# Altium PCB PA_Receiver.PcbDoc (part 1 of 2)
Units mm, origin at the board's own origin, x right, y up, seen from the top; angles counter-clockwise.
Board outline 99.95 x 68.33 mm, 4 copper layers (Top Layer, Layer 1, Layer 2, Bottom Layer), stack 0.603 mm thick; 128 components, 106 nets, 468 pads, 289 vias.
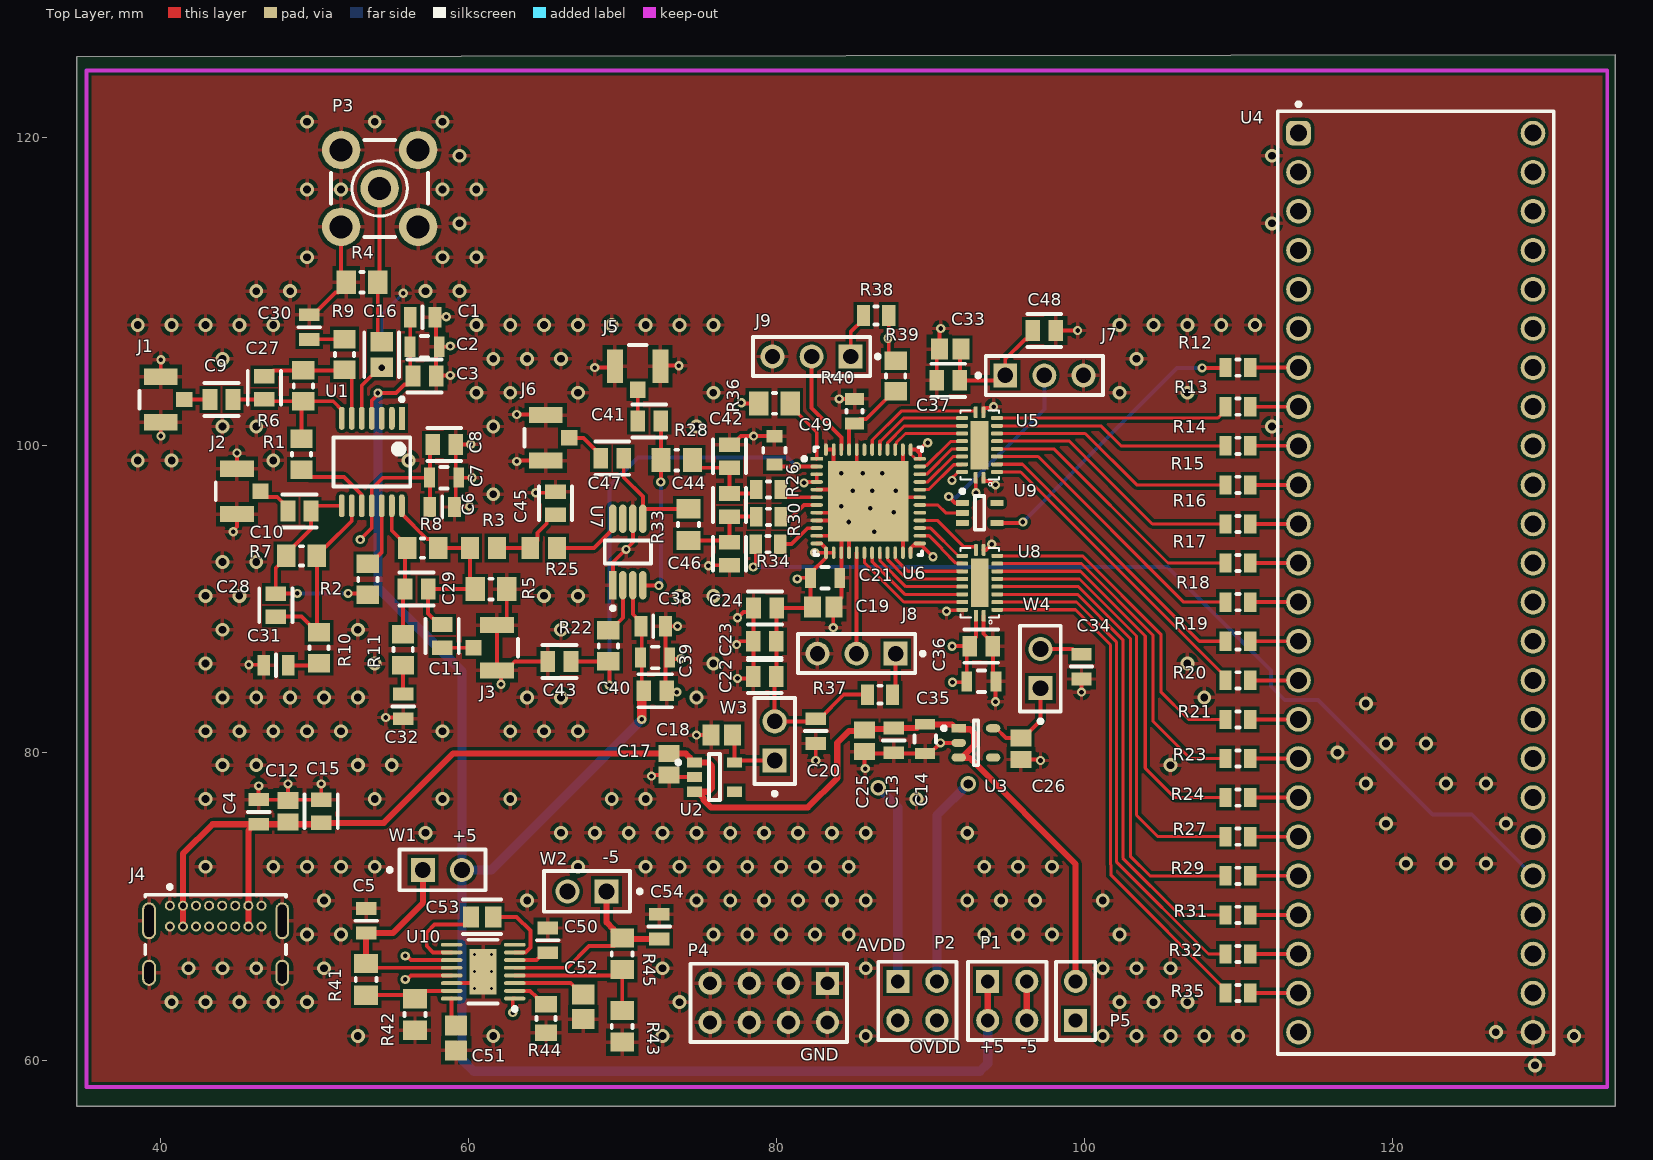
[diagram p0: Top Layer view]
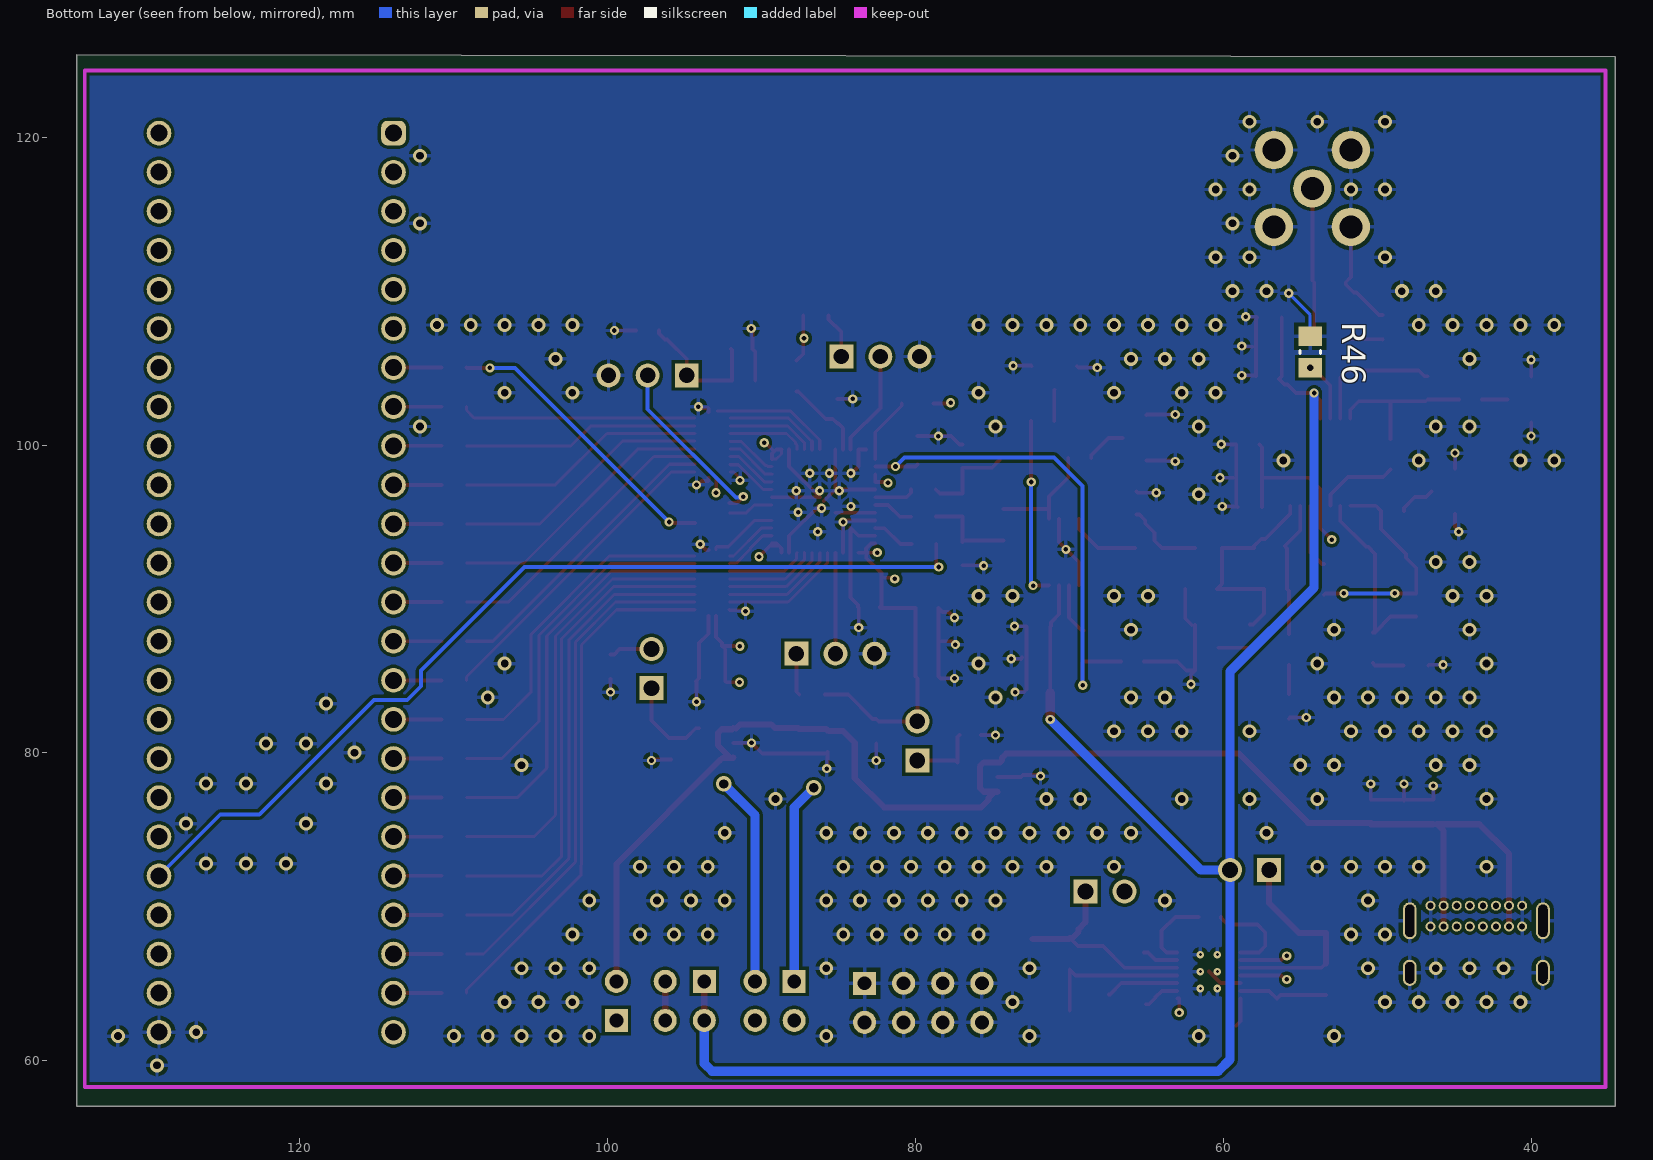
[diagram p1: Bottom Layer view, seen from below]
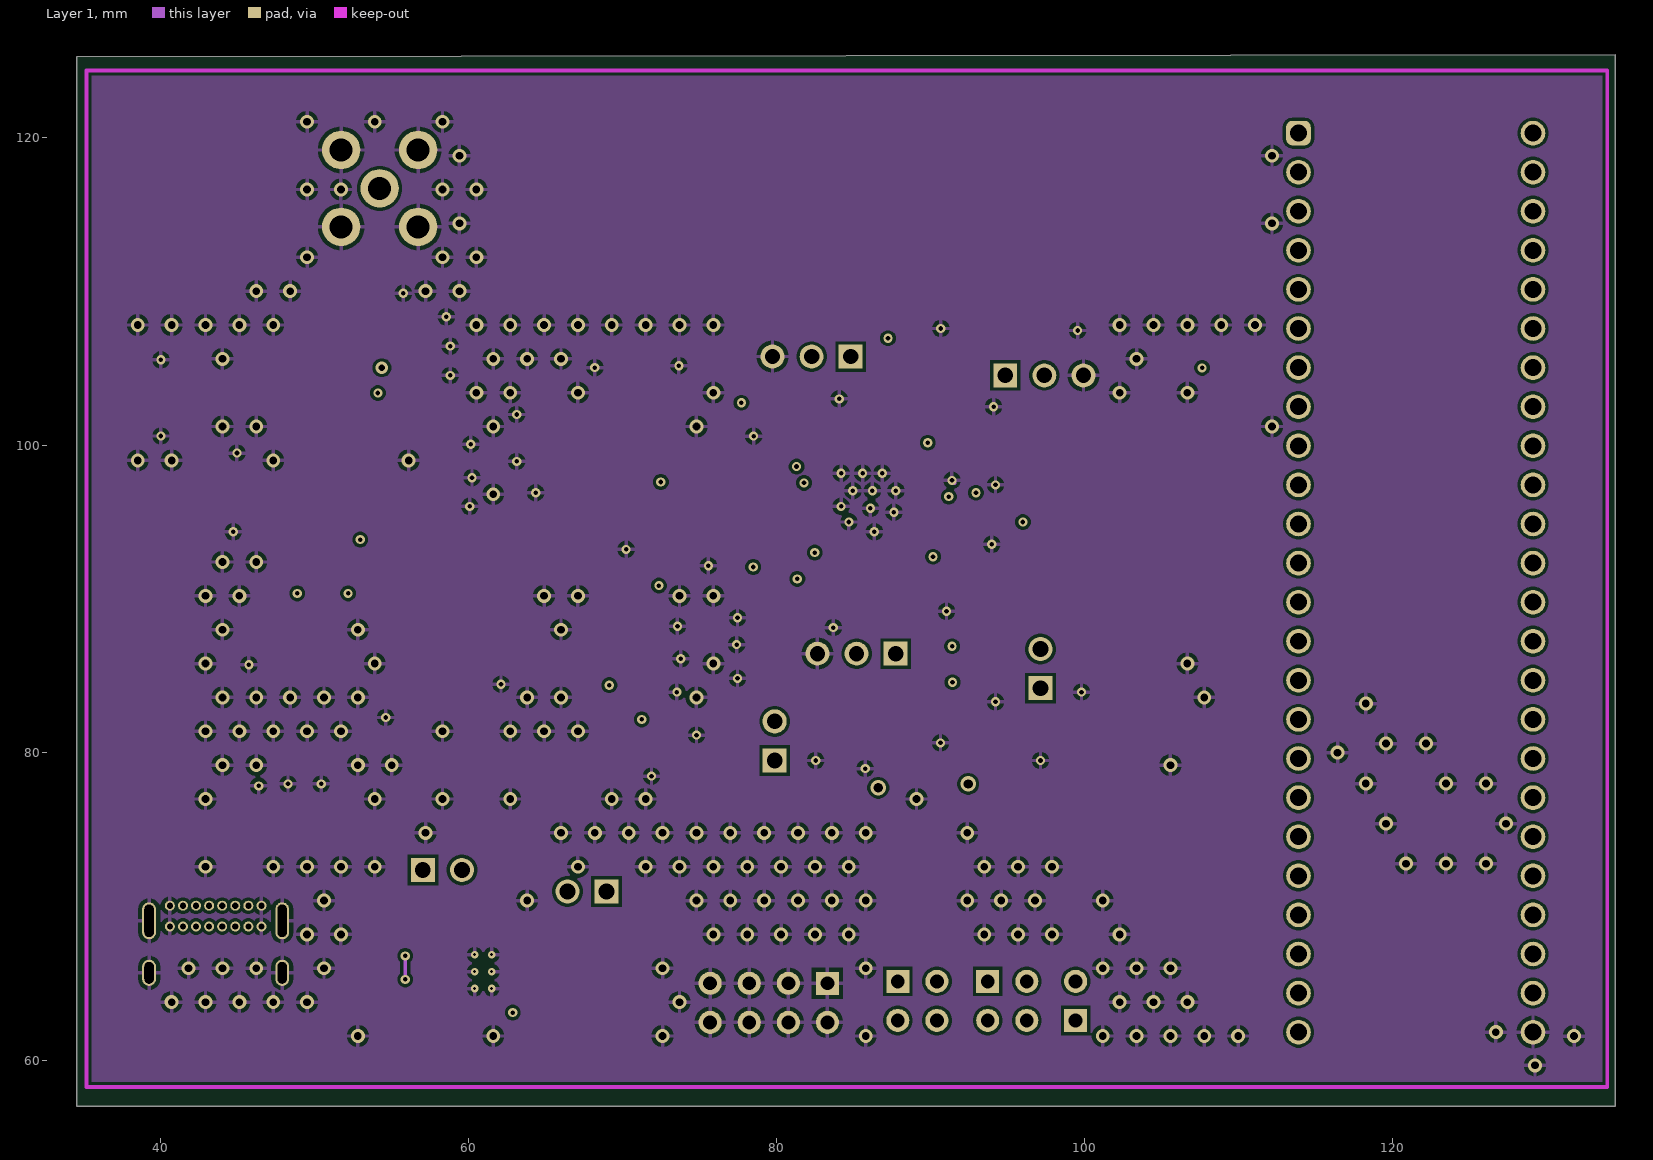
[diagram p2: Layer 1]
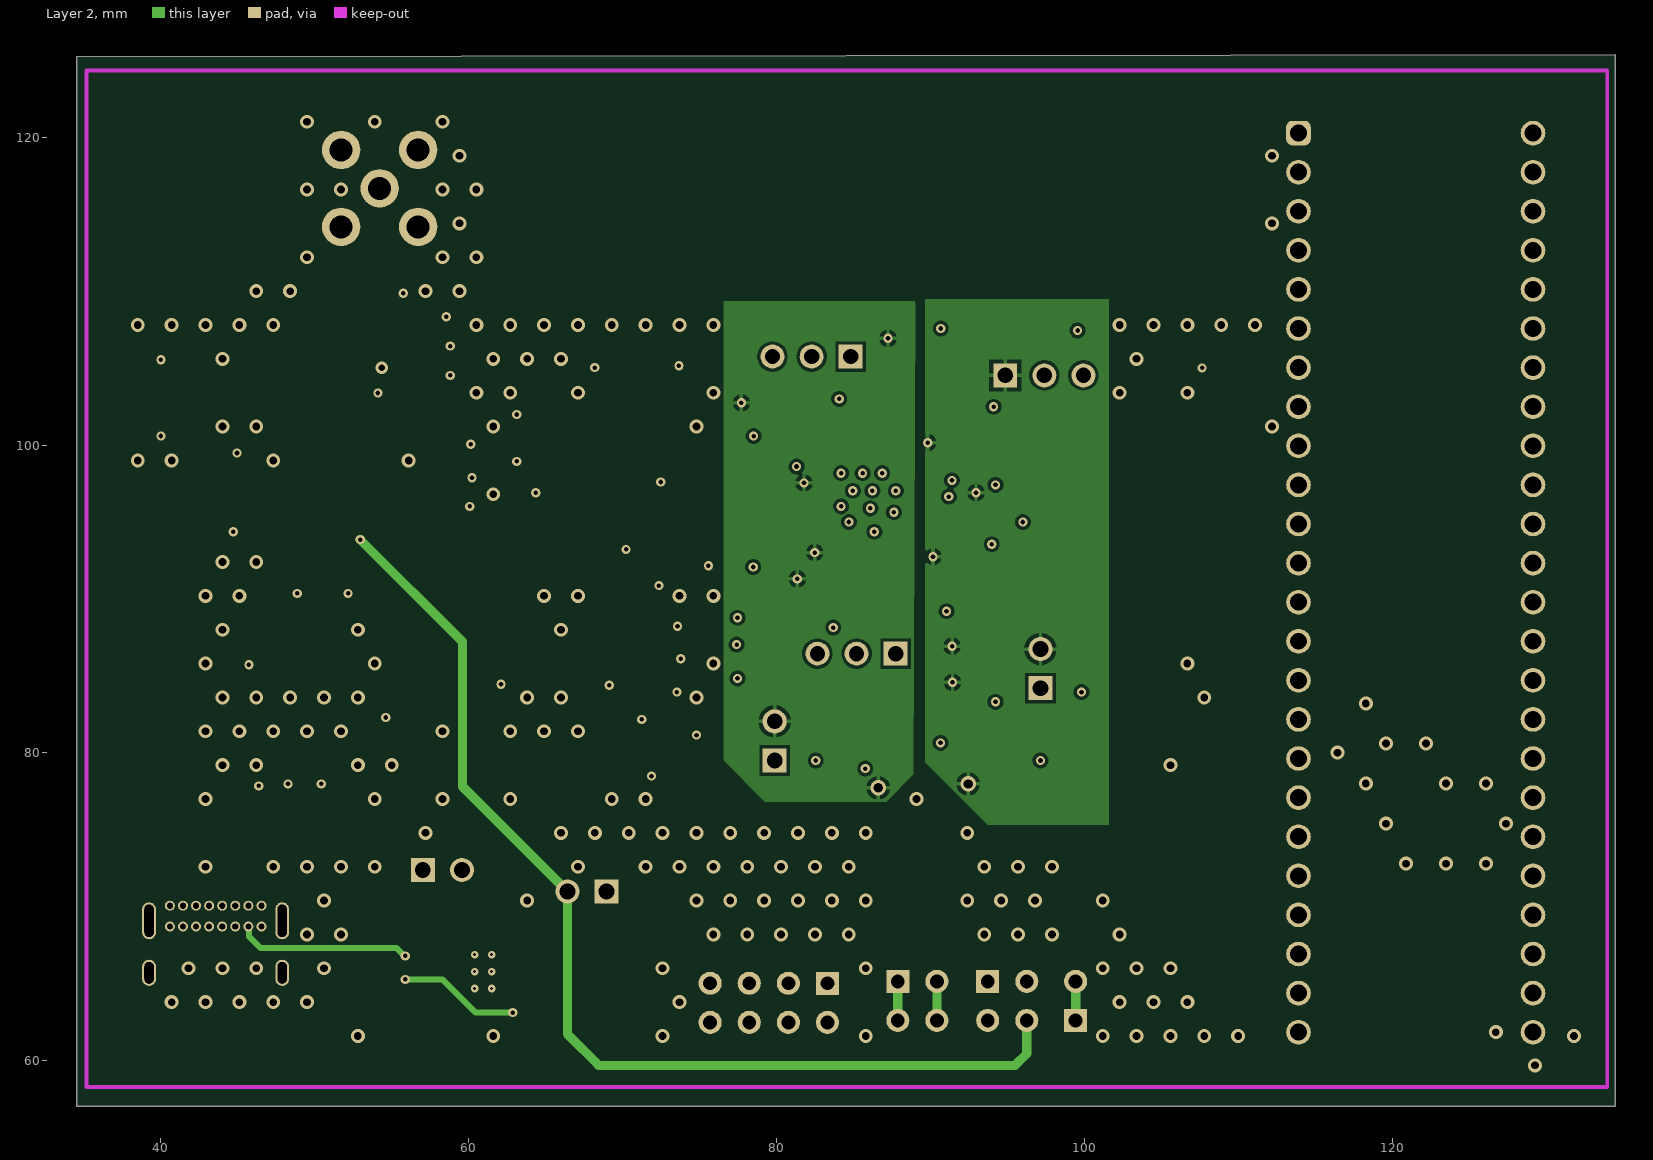
[diagram p3: Layer 2]
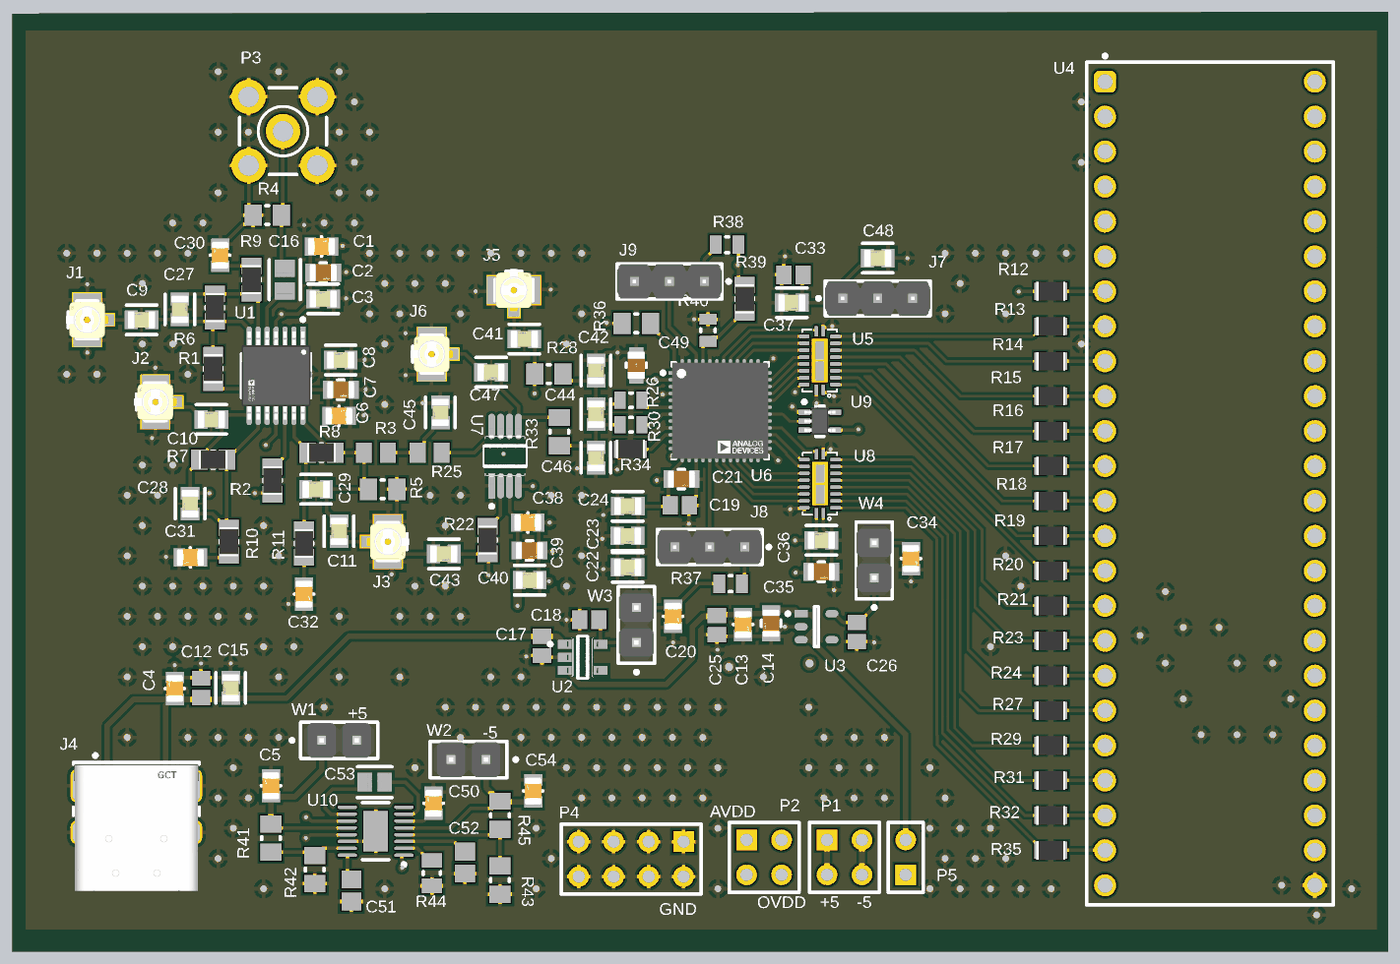
[diagram p5: 3D render of the assembled board from above, using the file's embedded part models]

## Layer stack, top to bottom
Top Solder: solder mask 0.0102, Solder Resist, Dk 3.5
Top Layer: signal copper 0.0356
Dielectric 2: prepreg 0.0711, PP-006, Dk 4.1
Layer 1: signal copper 0.035
Dielectric 1: dielectric 0.32, FR-4, Dk 4.8
Layer 2: signal copper 0.035
Dielectric 3: prepreg 0.0711, PP-006, Dk 4.1
Bottom Layer: signal copper 0.0356
Bottom Solder: solder mask 0.0102, Solder Resist, Dk 3.5

## Board outline
34.544,125.222 34.544,57.023 134.493,57.023 134.493,125.349

## Design rules (kind name [scope] priority, off if disabled: settings)
Clearance [All] p1: gap=0.2 ignorepadtopadclearanceinfootprint=TRUE
PolygonConnect [All] p1: connectstyle=Relief reliefconductorwidth=0.254 reliefentries=4 polygonreliefangle="90 Angle" airgapwidth=0.254
RoutingVias [All] p1: holewidth=0.3 width=0.6 viastyle="Through Hole" minholewidth=0.254 minwidth=0.5 maxholewidth=1 maxwidth=2
SolderMaskExpansion [All] p1: expansion=0.1 istentingtop=FALSE
SupplyNets "Schematic Supply Nets" [InNet('GND')] p1: voltage=0.000
Width [All] p1: maxlimit=2 minlimit=0.2 preferedwidth=0.2 minimp=50.000000 maximp=50.000000 favimp=50.000000
30 further rules are at their usual default settings.

## Components (designator, comment, footprint, x,y, rotation, side; value= is the part's Value field where it differs from the comment)
C1 "CL21B106KOQNNNG" FP-CL21B106KOQNNNG-MFG 57.009,108.29 r0 top value=10uF
C2 "GRM21BR71C475KE51K" FP-GRM21B-0_15-MFG 57.136,106.385 r0 top
C3 "C0805C104K5RACTU" FP-C0805C-DN-MFG 57.136,104.48 r0 top value="0.10 ¦ÌF"
C4 "CL21B106KOQNNNG" FP-CL21B106KOQNNNG-MFG 46.355,76.162 r90 top value=10uF
C5 "CL21B106KOQNNNG" FP-CL21B106KOQNNNG-MFG 53.34,69.088 r90 top value=10uF
C6 "CL21B106KOQNNNG" FP-CL21B106KOQNNNG-MFG 58.279,95.971 r0 top value=10uF
C7 "GRM21BR71C475KE51K" FP-GRM21B-0_15-MFG 58.406,97.876 r0 top
C8 "C0805C104K5RACTU" FP-C0805C-DN-MFG 58.406,100.035 r0 top value="0.10 ¦ÌF"
C9 "C0805C102K5RACTU" FP-C0805C-DN-MFG 43.94,102.956 r0 top value="1,000 pF"
C10 "C0805C102K5RACTU" FP-C0805C-DN-MFG 49.008,95.717 r0 top value="1,000 pF"
C11 "C0805C102K5RACTU" FP-C0805C-DN-MFG 58.279,87.589 r90 top value="1,000 pF"
C12 "C0805C105K3RACTU" CAPC2013X140X50LL20T25 48.26,76.2 r270 top
C13 "CL21B106KOQNNNG" FP-CL21B106KOQNNNG-MFG 87.63,80.81 r270 top value=10uF
C14 "GRM21BR71C475KE51K" FP-GRM21B-0_15-MFG 89.662,80.899 r270 top
C15 "C0805C104K5RACTU" FP-C0805C-DN-MFG 50.419,76.2 r90 top value="0.10 ¦ÌF"
C16 "CL21B222JBANNNC" FP-CL21-IPC_B 54.342,105.877 r270 top
C17 "C0805C105K3RACTU" CAPC2013X140X50LL20T25 73.025,79.248 r90 top
C18 "C0805C105K3RACTU" CAPC2013X140X50LL20T25 76.454,81.153 r0 top
C19 "C0805C105K3RACTU" CAPC2013X140X50LL20T25 83.028,89.47 r180 top
C20 "CL21B106KOQNNNG" FP-CL21B106KOQNNNG-MFG 82.55,81.407 r270 top value=10uF
C21 "GRM21BR71C475KE51K" FP-GRM21B-0_15-MFG 83.155,91.375 r0 top
C22 "C0805C104K5RACTU" FP-C0805C-DN-MFG 79.248,84.963 r180 top value="0.10 ¦ÌF"
C23 "C0805C104K5RACTU" FP-C0805C-DN-MFG 79.236,87.249 r180 top value="0.10 ¦ÌF"
C24 "C0805C104K5RACTU" FP-C0805C-DN-MFG 79.26,89.408 r180 top value="0.10 ¦ÌF"
C25 "C0805C105K3RACTU" CAPC2013X140X50LL20T25 85.725,80.772 r90 top
C26 "C0805C105K3RACTU" CAPC2013X140X50LL20T25 95.885,80.264 r90 top
C27 "C0805C150K5RACTU" FP-C0805C-DN-MFG 46.722,103.718 r270 top value="15 pF"
C28 "C0805C150K5RACTU" FP-C0805C-DN-MFG 47.468,89.597 r90 top value="15 pF"
C29 "C0805C150K5RACTU" FP-C0805C-DN-MFG 56.616,90.637 r0 top value="15 pF"
C30 "CL21B106KOQNNNG" FP-CL21B106KOQNNNG-MFG 49.643,107.655 r90 top value=10uF
C31 "CL21B106KOQNNNG" FP-CL21B106KOQNNNG-MFG 47.484,85.684 r180 top value=10uF
C32 "CL21B106KOQNNNG" FP-CL21B106KOQNNNG-MFG 55.739,83.017 r270 top value=10uF
C33 "C0805C105K3RACTU" CAPC2013X140X50LL20T25 91.283,106.234 r0 top
C34 "CL21B106KOQNNNG" FP-CL21B106KOQNNNG-MFG 99.822,85.598 r270 top value=10uF
C35 "GRM21BR71C475KE51K" FP-GRM21B-0_15-MFG 93.315,84.644 r0 top
C36 "C0805C104K5RACTU" FP-C0805C-DN-MFG 93.315,86.93 r0 top value="0.10 ¦ÌF"
C37 "C0805C104K5RACTU" FP-C0805C-DN-MFG 91.168,104.202 r180 top value="0.10 ¦ÌF"
C38 "CL21B106KOQNNNG" FP-CL21B106KOQNNNG-MFG 71.995,88.224 r0 top value=10uF
C39 "GRM21BR71C475KE51K" FP-GRM21B-0_15-MFG 72.122,86.192 r0 top
C40 "C0805C104K5RACTU" FP-C0805C-DN-MFG 72.122,84.033 r0 top value="0.10 ¦ÌF"
C41 "C0805C102K5RACTU" FP-C0805C-DN-MFG 71.741,101.559 r0 top value="1,000 pF"
C42 "C0805C100J5RACTU" FP-C0805C-DN-MFG 76.948,99.273 r270 top value="10 pF"
C43 "C0805C104K5RACTU" FP-C0805C-DN-MFG 65.899,85.938 r180 top value="0.10 ¦ÌF"
C44 "C0805C100J5RACTU" FP-C0805C-DN-MFG 76.948,96.098 r270 top value="10 pF"
C45 "C0805C100J5RACTU" FP-C0805C-DN-MFG 65.645,96.225 r90 top value="10 pF"
C46 "C0805C100J5RACTU" FP-C0805C-DN-MFG 76.948,92.935 r270 top value="10 pF"
C47 "C0805C102K5RACTU" FP-C0805C-DN-MFG 69.328,99.146 r180 top value="1,000 pF"
C48 "C0805C104K5RACTU" FP-C0805C-DN-MFG 97.409,107.442 r0 top value="0.10 ¦ÌF"
C49 "C2012X7R1C225K125AB" FP-C2012-125-0_2-MFG 79.869,99.654 r90 top
C50 "CL21B106KOQNNNG" FP-CL21B106KOQNNNG-MFG 65.151,67.818 r90 top value=10uF
C51 "C0805F103K5RACTU" CAPC2013X100X50NL20T25 59.182,61.468 r90 top
C52 "C0805F103K5RACTU" CAPC2013X100X50NL20T25 67.437,63.5 r90 top
C53 "CL21B105KAFNNNG" FP-CL21-IPC_C 60.869,69.342 r0 top
C54 "CL21B106KOQNNNG" FP-CL21B106KOQNNNG-MFG 72.39,68.707 r90 top value=10uF
J1 "U.FL-R-SMT-1(10)" FP-U_FL-R-SMT-1_10-MFG 39.99,102.956 r270 top
J2 "U.FL-R-SMT-1(10)" FP-U_FL-R-SMT-1_10-MFG 44.944,96.987 r270 top
J3 "U.FL-R-SMT-1(10)" FP-U_FL-R-SMT-1_10-MFG 61.835,86.827 r90 top
J4 "USB4085-GF-A" FP-USB4085-GF-A-MFG 43.561,66.04 r0 top
J5 "U.FL-R-SMT-1(10)" FP-U_FL-R-SMT-1_10-MFG 70.979,105.115 r180 top
J6 "U.FL-R-SMT-1(10)" FP-U_FL-R-SMT-1_10-MFG 65.01,100.465 r270 top
J7 "90120-0123" FP-90120-0123-MFG 97.409,104.521 r0 top
J8 "90120-0123" FP-90120-0123-MFG 85.203,86.446 r180 top
J9 "90120-0123" FP-90120-0123-MFG 82.282,105.75 r180 top
P1 "Header 2X2" HDR2X2 93.726,65.151 r270 top
P2 "Header 2X2" HDR2X2 87.884,65.151 r270 top
P3 "SMB" SMB_V-RJ45 54.215,116.672 r270 top
P4 "Header 4X2" HDR2X4 83.312,65.024 r180 top
P5 "Header 2" HDR1X2 99.441,62.611 r90 top
R1 "RC0805FR-071KL" RESC2013X60X35ML10T20 49.135,99.4 r270 top
R2 "RC0805FR-071KL" RESC2013X60X35ML10T20 53.453,91.272 r90 top
R3 "ERJ-6GEY0R00V" RESC2013X70X40NL20T20 60.96,93.304 r0 top
R4 "RK73B2ATTD510J" RESC2013X60X30ML20T20 53.072,110.576 r0 top
R5 "RK73B2ATTD510J" RESC2013X60X30ML20T20 61.454,90.637 r180 top
R6 "RC0805FR-071KL" RESC2013X60X35ML10T20 49.262,103.845 r270 top
R7 "RC0805FR-071KL" RESC2013X60X35ML10T20 49.135,92.796 r180 top
R8 "RC0805FR-071KL" RESC2013X60X35ML10T20 57.009,93.304 r0 top
R9 "RC0805FR-07100RL" RESC2013X60X35ML10T20 51.929,105.877 r90 top
R10 "RC0805FR-07100RL" RESC2013X60X35ML10T20 50.278,86.827 r270 top
R11 "RC0805FR-07100RL" RESC2013X60X35ML10T20 55.739,86.7 r270 top
R12 "RC0805FR-0733RL" RESC2013X60X35LL10T20 109.982,105.029 r0 top
R13 "RC0805FR-0733RL" RESC2013X60X35LL10T20 109.982,102.489 r0 top
R14 "RC0805FR-0733RL" RESC2013X60X35LL10T20 109.982,99.949 r0 top
R15 "RC0805FR-0733RL" RESC2013X60X35LL10T20 109.982,97.409 r0 top
R16 "RC0805FR-0733RL" RESC2013X60X35LL10T20 109.982,94.869 r0 top
R17 "RC0805FR-0733RL" RESC2013X60X35LL10T20 109.982,92.329 r0 top
R18 "RC0805FR-0733RL" RESC2013X60X35LL10T20 109.982,89.789 r0 top
R19 "RC0805FR-0733RL" RESC2013X60X35LL10T20 109.982,87.249 r0 top
R20 "RC0805FR-0733RL" RESC2013X60X35LL10T20 109.982,84.709 r0 top
R21 "RC0805FR-0733RL" RESC2013X60X35LL10T20 109.982,82.169 r0 top
R22 "RC0805FR-07100RL" RESC2013X60X35ML10T20 69.074,86.954 r90 top
R23 "RC0805FR-0733RL" RESC2013X60X35LL10T20 109.982,79.629 r0 top
R24 "RC0805FR-0733RL" RESC2013X60X35LL10T20 109.982,77.089 r0 top
R25 "ERJ-6GEY0R00V" RESC2013X70X40NL20T20 64.869,93.304 r0 top
R26 "RC0805JR-075R1L" RESC2013X60X35LL10T20 79.488,97.114 r0 top
R27 "RC0805FR-0733RL" RESC2013X60X35LL10T20 109.982,74.549 r0 top
R28 "RK73B2ATTD510J" RESC2013X60X30ML20T20 73.519,99.019 r180 top
R29 "RC0805FR-0733RL" RESC2013X60X35LL10T20 109.982,72.009 r0 top
R30 "RC0805JR-075R1L" RESC2013X60X35LL10T20 79.488,95.336 r0 top
R31 "RC0805FR-0733RL" RESC2013X60X35LL10T20 109.982,69.469 r0 top
R32 "RC0805FR-0733RL" RESC2013X60X35LL10T20 109.982,66.929 r0 top
R33 "RK73B2ATTD510J" RESC2013X60X30ML20T20 74.281,94.828 r90 top
R34 "RC0805FR-0733RL" RESC2013X60X35LL10T20 79.45,93.558 r0 top
R35 "RC0805FR-0733RL" RESC2013X60X35LL10T20 109.982,64.389 r0 top
R36 "RK73H2ATTD10R0F" RESC2013X60X30ML20T20 79.869,102.702 r180 top
R37 "RK73H2ATTD1002F" RESC2013X60X30LL20T20 86.727,83.779 r180 top
R38 "RK73H2ATTD1002F" RESC2013X60X30LL20T20 86.473,108.417 r0 top
R39 "RC0805FR-071KL" RESC2013X60X35ML10T20 87.743,104.48 r90 top
R40 "Resistor" RESC2013X60X35LL10T20 85.076,102.194 r270 top value=open
R41 "63k" RESC2013X60X30ML20T20 53.34,65.278 r90 top
R42 "20k" RESC2013X60X30ML20T20 56.515,62.992 r90 top
R43 "20k" RESC2013X60X30ML20T20 69.977,62.23 r270 top
R44 "CRCW0805200KFKEA" RESC2013X50X30NL20T20 65.024,62.738 r90 top
R45 "63k" RESC2013X60X30ML20T20 69.977,66.938 r270 top
R46 "RK73B2ATTD510J" RESC2013X60X30ML20T20 54.356,106.045 r270 bottom
U1 "ADA4807-4ARUZ-R7" FP-RU-14-IPC_B 53.707,98.892 r270 top
U2 "MIC5501-3.0YM5-TR" FP-SOT23-5LD-PL-1-MFG 75.976,78.425 r0 top
U3 "MIC5365-3.3YD5-TR" FP-TSOT-5LD-PL-1-IPC_C 92.964,80.645 r0 top
U4 "CMOD_A7_35" PCBComponent_1 111.521,96.405 r0 top
U5 "74VCX245BQX" QFN21P50_450X250X80L40X24T305X105N 93.196,99.999 r90 top
U6 "LTC2203CUK#TRPBF" FP-UK-48-05-08-1704-IPC_C 85.965,96.352 r0 top
U7 "LTC6363IMS8-0.5#PBF" FP-MS8-8-05-08-1660-IPC_A 70.344,93.05 r90 top
U8 "74VCX245BQX" QFN21P50_450X250X80L40X24T305X105N 93.212,91.046 r90 top
U9 "SN74AUC1G86DCKR" DCK0005A_N 93.204,95.59 r0 top
U10 "LTC3260EMSE#TRPBF" LT-MSE-16-EDP_L 60.942,65.782 r180 top
W1 "Jumper" FP-M20-9990246-MFG 58.293,72.39 r0 top
W2 "Jumper" FP-M20-9990246-MFG 67.691,70.993 r180 top
W3 "Jumper" FP-M20-9990246-MFG 79.883,80.772 r90 top
W4 "Jumper" FP-M20-9990246-MFG 97.155,85.471 r90 top

## Footprints (in the part's own frame and the unit in brackets; to place one, negate y for a bottom-side part, rotate by r counter-clockwise, add the part's x,y. Pads: shape width x height; smd on the part's side, far side on the other; paste and mask are expansions set on the pad)
CAPC2013X100X50NL20T25 [mm] "Chip Capacitor, 2-Leads, Body 2.00x1.25mm, IPC Medium Density"
  rect 1.3x1.45 smd: 1(-0.8,0) 2(0.8,0)
  body extent -1.1,-0.72 1.1,0.72, height 1
CAPC2013X140X50LL20T25 [mm] "Chip Capacitor, 2-Leads, Body 2.00x1.25mm, IPC High Density"
  rect 1.1x1.35 smd: 1(-0.7,0) 2(0.7,0)
  body extent -1.1,-0.72 1.1,0.72, height 1.4
DCK0005A_N [mm] "SOT23, 5-Leads, Body 2.15x1.4mm, Pitch 0.65mm, IPC Medium Density"
  rrect25% 0.85x0.4 smd: 1(-1.125,0.65) 2(-1.125,0) 3(-1.125,-0.65) 4(1.125,-0.65) 5(1.125,0.65)
  silkscreen extent -1.25,-1.1 0.3,1.52, body extent -1.14,-1 1.14,1, height 0.94
FP-90120-0123-MFG [mm]
  rect 1.55x1.55 hole 1 paste-2539.97 mask+0: 1(-2.54,0)
  round 1.55 hole 1 paste-2539.97 mask+0: 2(0,0) 3(2.54,0)
  silkscreen extent -4.42,-1.27 3.81,1.27, body extent -3.91,-1.37 3.91,1.37, height 0.25
FP-C0805C-DN-MFG [mm]
  rect 0.95x1.35 smd paste+0 mask+0: 1(-0.75,0) 2(0.75,0)
  silkscreen extent -1.1,-1.07 1.1,1.07, body extent -1,-0.63 1,0.63, height 0.88
FP-C2012-125-0_2-MFG [mm]
  rect 0.8x1.05 smd paste+0 mask+0: 1(-0.925,0) 2(0.925,0)
  silkscreen extent -0.15,-0.72 0.15,0.72, body extent -1.43,-0.82 1.43,0.82, height 0.25
FP-CL21-IPC_B [mm]
  rect 1.255x1.456 smd paste+0 mask+0: 1(-0.826,0) 2(0.826,0)
  silkscreen extent -1.45,-1.13 1.45,1.13, body extent -1.7,-0.98 1.7,0.98, height 0.25
FP-CL21-IPC_C [mm]
  rect 1.055x1.356 smd paste+0 mask+0: 1(-0.726,0) 2(0.726,0)
  silkscreen extent -1.25,-1.12 1.25,1.12, body extent -1.35,-0.82 1.35,0.82, height 0.25
FP-CL21B106KOQNNNG-MFG [mm]
  rect 0.825x1.325 smd paste+0 mask+0: 1(-0.8,0) 2(0.8,0)
  silkscreen extent 0,-0.7 0,0.7, body extent -1,-0.63 1,0.63, height 1.4
FP-GRM21B-0_15-MFG [mm]
  rect 0.7x1.3 smd paste+0 mask+0: 1(-0.95,0) 2(0.95,0)
  silkscreen extent -0.23,-0.7 0.23,0.7, body extent -1,-0.63 1,0.63, height 1.4
FP-M20-9990246-MFG [mm]
  rect 1.57x1.57 hole 1.02 paste-2539.97 mask+0: 1(-1.27,0)
  round 1.57 hole 1.02 paste-2539.97 mask+0: 2(1.27,0)
  silkscreen extent -3.55,-1.32 2.79,1.32, body extent -2.89,-1.42 2.89,1.42, height 0.25
FP-MS8-8-05-08-1660-IPC_A [mm]
  rect 1.84x0.495 smd paste+0 mask+0: 1(-2.16,0.975)
  rrect100% 1.84x0.495 smd paste+0 mask+0: 2(-2.16,0.325) 3(-2.16,-0.325) 4(-2.16,-0.975) 5(2.16,-0.975) 6(2.16,-0.325) 7(2.16,0.325) 8(2.16,0.975)
  silkscreen extent -3.77,-1.5 0.74,1.5, body extent -3.58,-2 3.58,2, height 0.25
FP-RU-14-IPC_B [mm]
  rect 1.488x0.381 smd paste+0 mask+0: 1(-2.841,1.95)
  rrect100% 1.488x0.381 smd paste+0 mask+0: 2(-2.841,1.3) 3(-2.841,0.65) 4(-2.841,0) 5(-2.841,-0.65) 6(-2.841,-1.3) 7(-2.841,-1.95) 8(2.841,-1.95) 9(2.841,-1.3) 10(2.841,-0.65) 11(2.841,0) 12(2.841,0.65) 13(2.841,1.3) 14(2.841,1.95)
  silkscreen extent -4.21,-2.5 1.6,2.5, body extent -3.84,-2.75 3.84,2.75, height 0.25
FP-SOT23-5LD-PL-1-MFG [mm]
  rect 1x0.66 smd paste+0 mask+0: 1(-1.3,0.95) 2(-1.3,0) 3(-1.3,-0.95) 4(1.3,-0.95) 5(1.3,0.95)
  silkscreen extent -2.47,-1.5 0.35,1.5, body extent -1.9,-1.6 1.9,1.6, height 0.25
FP-TSOT-5LD-PL-1-IPC_C [mm]
  rect 0.94x0.532 smd paste+0 mask+0: 1(-1.115,0.95)
  rrect100% 0.94x0.532 smd paste+0 mask+0: 2(-1.115,0) 3(-1.115,-0.95) 4(1.116,-0.95) 5(1.116,0.95)
  silkscreen extent -2.21,-1.45 0.15,1.45
FP-U_FL-R-SMT-1_10-MFG [mm]
  rect 1x1.05 smd paste-1000 mask+0: 1(0,1.525)
  rect 1.05x2.2 smd paste-1000 mask+0: 2(-1.475,0) 3(1.475,0)
  silkscreen extent -0.58,-1.38 0.58,-1.38, body extent -2.1,-1.48 2.1,2.15, height 0.25
FP-UK-48-05-08-1704-IPC_C [mm]
  rect 0.81x0.242 smd paste+0 mask+0: 1(-3.351,2.75)
  rrect100% 0.81x0.242 smd paste+0 mask+0: 2(-3.351,2.25) 3(-3.351,1.75) 4(-3.351,1.25) 5(-3.351,0.75) 6(-3.351,0.25) 7(-3.351,-0.25) 8(-3.351,-0.75) 9(-3.351,-1.25) 10(-3.351,-1.75) 11(-3.351,-2.25) 12(-3.351,-2.75) 25(3.351,-2.75) 26(3.351,-2.25) 27(3.351,-1.75) 28(3.351,-1.25) 29(3.351,-0.75) 30(3.351,-0.25) 31(3.351,0.25) 32(3.351,0.75) 33(3.351,1.25) 34(3.351,1.75) 35(3.351,2.25) 36(3.351,2.75)
  rrect100% 0.242x0.81 smd paste+0 mask+0: 13(-2.75,-3.351) 14(-2.25,-3.351) 15(-1.75,-3.351) 16(-1.25,-3.351) 17(-0.75,-3.351) 18(-0.25,-3.351) 19(0.25,-3.351) 20(0.75,-3.351) 21(1.25,-3.351) 22(1.75,-3.351) 23(2.25,-3.351) 24(2.75,-3.351) 37(2.75,3.351) 38(2.25,3.351) 39(1.75,3.351) 40(1.25,3.351) 41(0.75,3.351) 42(0.25,3.351) 43(-0.25,3.351) 44(-0.75,3.351) 45(-1.25,3.351) 46(-1.75,3.351) 47(-2.25,3.351) 48(-2.75,3.351)
  rect 5.25x5.25 smd paste-1000 mask+0: 49(0,0)
  silkscreen extent -4.28,-3.5 3.5,3.5, body extent -3.86,-3.86 3.86,3.86, height 0.25
FP-USB4085-GF-A-MFG [mm]
  rrect100% 0.9x2.4 hole 2.1 slot 0.6 at 0 deg paste-2539.97 mask+0: 1(-4.325,3.045) 2(4.325,3.045)
  rrect100% 0.9x1.7 hole 1.4 slot 0.6 at 0 deg paste-2539.97 mask+0: 3(-4.325,-0.335) 4(4.325,-0.335)
  round 0.65 hole 0.4 paste-2539.97 mask+0: A1(-2.975,4.025) A4(-2.125,4.025) A5(-1.275,4.025) A6(-0.425,4.025) A7(0.425,4.025) A8(1.275,4.025) A9(2.125,4.025) A12(2.975,4.025) B1(2.975,2.675) B4(2.125,2.675) B5(1.275,2.675) B6(0.425,2.675) B7(-0.425,2.675) B8(-1.275,2.675) B9(-2.125,2.675) B12(-2.975,2.675)
  silkscreen extent -4.57,0.89 4.57,5.37, body extent -4.87,-4.83 4.87,4.83, height 0.25
HDR1X2 [mm] "Connector; Header; 2 Position"
  rect 1.5x1.5 hole 0.9: 1(0,0)
  round 1.5 hole 0.9: 2(2.54,0)
  silkscreen extent -1.27,-1.27 3.81,1.27
HDR2X2 [mm] "Connector; Header; 2x2 Position"
  rect 1.5x1.5 hole 0.9: 1(0,0)
  round 1.5 hole 0.9: 2(0,2.54) 3(2.54,0) 4(2.54,2.54)
  silkscreen extent -1.27,-1.27 3.81,3.81
HDR2X4 [mm] "Connector; Header; 4x2 Position"
  rect 1.5x1.5 hole 0.9: 1(0,0)
  round 1.5 hole 0.9: 2(0,2.54) 3(2.54,0) 4(2.54,2.54) 5(5.08,0) 6(5.08,2.54) 7(7.62,0) 8(7.62,2.54)
  silkscreen extent -1.27,-1.27 8.89,3.81
LT-MSE-16-EDP_L [mm] "SOP, 16-Leads, Body 4.1x3.1mm, Pitch 0.5mm, Thermal Pad 2.95x1.76mm, IPC High Density"
  oval 1.4x0.25 smd: 1(-2.05,1.75) 2(-2.05,1.25) 3(-2.05,0.75) 4(-2.05,0.25) 5(-2.05,-0.25) 6(-2.05,-0.75) 7(-2.05,-1.25) 8(-2.05,-1.75) 9(2.05,-1.75) 10(2.05,-1.25) 11(2.05,-0.75) 12(2.05,-0.25) 13(2.05,0.25) 14(2.05,0.75) 15(2.05,1.25) 16(2.05,1.75)
  rect 1.76x2.95 smd: 17(0,0)
  silkscreen extent -2.18,-2.08 0.95,2.55, body extent -1.55,-2.05 1.55,2.05, height 1.1
PCBComponent_1 [mm]
  rrect50% 1.6x1.6 hole 1.1: 1(2.398,23.864)
  round 1.6 hole 1.1: 2(2.398,21.324) 3(2.398,18.784) 4(2.398,16.244) 5(2.398,13.704) 6(2.398,11.164) 7(2.398,8.624) 8(2.398,6.084) 9(2.398,3.544) 10(2.398,1.004) 11(2.398,-1.536) 12(2.398,-4.076) 13(2.398,-6.616) 14(2.398,-9.156) 15(2.398,-11.696) 16(2.398,-14.236) 17(2.398,-16.776) 18(2.398,-19.316) 19(2.398,-21.856) 20(2.398,-24.396) 21(2.398,-26.936) 22(2.398,-29.476) 23(2.398,-32.016) 24(2.398,-34.556) 25(17.638,-34.556) 26(17.638,-32.016) 27(17.638,-29.476) 28(17.638,-26.936) 29(17.638,-24.396) 30(17.638,-21.856) 31(17.638,-19.316) 32(17.638,-16.776) 33(17.638,-14.236) 34(17.638,-11.696) 35(17.638,-9.156) 36(17.638,-6.616) 37(17.638,-4.076) 38(17.638,-1.536) 39(17.638,1.004) 40(17.638,3.544) 41(17.638,6.084) 42(17.638,8.624) 43(17.638,11.164) 44(17.638,13.704) 45(17.638,16.244) 46(17.638,18.784) 47(17.638,21.324) 48(17.638,23.864)
  silkscreen extent 1.05,-35.98 18.98,25.86
QFN21P50_450X250X80L40X24T305X105N [mm]
  rrect53% 0.76x0.26 smd: 1(-2.135,-0.25) 10(2.135,-0.25) 11(2.135,0.25) 20(-2.135,0.25)
  rrect53% 0.26x0.76 smd: 2(-1.75,-1.135) 3(-1.25,-1.135) 4(-0.75,-1.135) 5(-0.25,-1.135) 6(0.25,-1.135) 7(0.75,-1.135) 8(1.25,-1.135) 9(1.75,-1.135) 12(1.75,1.135) 13(1.25,1.135) 14(0.75,1.135) 15(0.25,1.135) 16(-0.25,1.135) 17(-0.75,1.135) 18(-1.25,1.135) 19(-1.75,1.135)
  rect 3.15x1.15 smd paste-3: 21(0,0)
  silkscreen extent -2.66,-1.25 2.25,1.25
RESC2013X50X30NL20T20 [mm] "Chip Resistor, 2-Leads, Body 2.00x1.25mm, IPC Medium Density"
  rect 1.05x1.45 smd: 1(-0.925,0) 2(0.925,0)
  silkscreen extent -0.1,-0.63 0.1,0.63, body extent -1.1,-0.72 1.1,0.72, height 0.5
RESC2013X60X30LL20T20 [mm] "Chip Resistor, 2-Leads, Body 2.00x1.25mm, IPC High Density"
  rect 0.85x1.35 smd: 1(-0.825,0) 2(0.825,0)
  silkscreen extent -0.1,-0.58 0.1,0.58, body extent -1.1,-0.72 1.1,0.72, height 0.6
RESC2013X60X30ML20T20 [mm] "Chip Resistor, 2-Leads, Body 2.00x1.25mm, IPC Low Density"
  rect 1.25x1.55 smd: 1(-1.025,0) 2(1.025,0)
  silkscreen extent -0.1,-0.67 0.1,0.67, body extent -1.1,-0.72 1.1,0.72, height 0.6
RESC2013X60X35LL10T20 [mm] "Chip Resistor, 2-Leads, Body 2.1x1.35mm, IPC High Density"
  rect 0.8x1.25 smd: 1(-0.8,0) 2(0.8,0)
  silkscreen extent -0.1,-0.53 0.1,0.53, body extent -1.05,-0.68 1.05,0.67, height 0.6
RESC2013X60X35ML10T20 [mm] "Chip Resistor, 2-Leads, Body 2.1x1.35mm, IPC Low Density"
  rect 1.2x1.45 smd: 1(-1,0) 2(1,0)
  silkscreen extent -0.1,-0.63 0.1,0.63, body extent -1.05,-0.68 1.05,0.67, height 0.6
RESC2013X70X40NL20T20 [mm] "Chip Resistor, 2-Leads, Body 2.00x1.25mm, IPC Medium Density"
  rect 1.15x1.45 smd: 1(-0.875,0) 2(0.875,0)
  body extent -1.1,-0.72 1.1,0.72, height 0.7
SMB_V-RJ45 [mm] "Connector; SMB Straight"
  round 2.5 hole 1.5: 1(0,0) 2(-2.5,2.5) 2(-2.5,-2.5) 2(2.5,2.5) 2(2.5,-2.5)
  silkscreen extent -3.15,-3.15 3.15,3.15

## Part data
C1 C4 C5 C6 C13 C20 C30 C31 C32 C34 C38 C50 C54: library part CMP-13271-000015-1, "CAP CER 10UF 16V X7R 0805", Capacitance=10uF, Manufacturer="Samsung Electro-Mechanics", Package=0, Temperature="-55¡ãC to +125¡ãC", Temperature Characteristic=X7R, Temperature Coefficient=15%, Temperature Range High=+125¡ãC, Temperature Range Low=-55¡ãC, Tolerance=10%, Voltage Rating=16V, Automotive=No, Category=Cap, ComponentLink2Description=Datasheet, ComponentLink2URL=http://product.samsungsem.com/mlcc/CL21B106KOQNNN.do, Device Class L1="Passive Components", Device Class L2=Capacitors, Device Class L3="Ceramic Capacitors", Digikey Description="CAP CER 10UF 16V X7R 0805", Height=1.4mm, Ipc Land Pattern Name=CAPC200125X125, Lead Free=Yes, Manufacturer Part Number=CL21B106KOQNNNG, Material=Ceramic, Octopart=https://octopart.com/cl21b106koqnnng-samsung-19995691, RoHS=TRUE
C2 C7 C14 C21 C35 C39: library part CMP-06035-031349-1, "Chip Multilayer Ceramic Capacitors for General Purpose, 0805, 4.7uF, X7R, 15%, 10%, 16V", Capacitance=4.7uF, Case/Package=0805, Dielectric=X7R, Tolerance=10%, Voltage Rating (DC)=16V, Length=2mm, Thickness=1.25mm, Width=1.25mm
C3 C8 C15 C22 C23 C24 C36 C37 C40 C43 C48: library part CMP-2007-00279-2, "CAP CER 0.1UF 50V X7R 0805", Capacitance="0.10 ¦ÌF", Manufacturer=KEMET, Package=C0805C-DN, Temperature="-55¡ãC to +125¡ãC", Temperature Characteristic=X7R, Temperature Coefficient=30ppm/¡ãC, Temperature Range High=+125¡ãC, Temperature Range Low=-55¡ãC, Tolerance=0.1, Voltage Rating="50 V", Automotive=No, Category=Cap, ComponentLink2Description=Datasheet, ComponentLink2URL=https://content.kemet.com/datasheets/KEM_C1003_C0G_SMD.pdf, Device Class L1="Passive Components", Device Class L2=Capacitors, Device Class L3="Ceramic Capacitors", Digikey Description="CAP CER 0.1UF 50V X7R 0805", Height=0.88mm, Ipc Land Pattern Name=CAPC200125X78, Lead Free=Yes, Manufacturer Part Number=C0805C104K5RACTU, Material=Ceramic, Mouser Description="Cap Ceramic 0.1uF 50V X7R 10% SMD 2.0 x 1.2 mm 125 C Paper T/R", Octopart=https://octopart.com/c0805c104k5ractu-kemet-143926, RoHS=TRUE
C9 C10 C11 C41 C47: library part CMP-2007-01097-2, "CAP CER 1000PF 50V X7R 0805", Capacitance="1,000 pF", Manufacturer=KEMET, Package=C0805C-DN, Temperature="-55¡ãC to +125¡ãC", Temperature Characteristic=X7R, Temperature Coefficient=30ppm/¡ãC, Temperature Range High=+125¡ãC, Temperature Range Low=-55¡ãC, Tolerance=0.1, Voltage Rating="50 V", Automotive=No, Category=Cap, ComponentLink2Description=Datasheet, ComponentLink2URL=https://content.kemet.com/datasheets/KEM_C1003_C0G_SMD.pdf, Device Class L1="Passive Components", Device Class L2=Capacitors, Device Class L3="Ceramic Capacitors", Digikey Description="CAP CER 1000PF 50V X7R 0805", Height=0.88mm, Ipc Land Pattern Name=CAPC200125X78, Lead Free=Yes, Manufacturer Part Number=C0805C102K5RACTU, Material=Ceramic, Mouser Description="Cap Ceramic 0.001uF 50V X7R 10% SMD 0805 125C Plastic T/R", Octopart=https://octopart.com/c0805c102k5ractu-kemet-93010, RoHS=TRUE
C12 C17 C18 C19 C25 C26 C33: library part CMP-2007-03234-1, Manufacturer=Kemet, Part Number=C0805C105K3RACTU
C16: library part CMP-13271-000077-1, "CL21 Series 0805 2.2nF 50V ¡À5% Tolerance X7R Multilayer Ceramic Chip Capacitor", Capacitance=2.2nF, Case Code (Imperial)=0805, Case Code (Metric)=2012, Dielectric=X7R, Max Operating Temperature=125¡ãC, Min Operating Temperature=-55¡ãC, Package Quantity=4000, Tolerance=5%, Voltage=50V, Case/Package=0805, Contact Plating=Tin, Depth=1.25mm, Height=0.65mm, Lead Free="Lead Free", Length=2mm, Mount="Surface Mount", Packaging="Tape and Reel", Radiation Hardening=No, Thickness=0.03inch, Voltage Rating=50V, Voltage Rating (DC)=50V, Width=0.049inch
C27 C28 C29: library part CMP-03020-023493-1, "CAP CER SMD 0805 15PF 50V 10% X7", Capacitance="15 pF", Manufacturer=KEMET, Package=C0805C-DN, Temperature="-55¡ãC to +125¡ãC", Temperature Characteristic=X7R, Temperature Coefficient=30ppm/¡ãC, Temperature Range High=+125¡ãC, Temperature Range Low=-55¡ãC, Tolerance=0.1, Voltage Rating="50 V", Automotive=No, Category=Cap, ComponentLink2Description=Datasheet, ComponentLink2URL=https://content.kemet.com/datasheets/KEM_C1003_C0G_SMD.pdf, Device Class L1="Passive Components", Device Class L2=Capacitors, Device Class L3="Ceramic Capacitors", Digikey Description="CAP CER SMD 0805 15PF 50V 10% X7", Height=0.88mm, Ipc Land Pattern Name=CAPC200125X78, Lead Free=Yes, Manufacturer Part Number=C0805C150K5RACTU, Material=Ceramic, Mouser Description="Cap Ceramic 15pF 50V X7R 10% SMD 0805 125¡ãC Paper T/R", Octopart=https://octopart.com/c0805c150k5ractu-kemet-88373275, RoHS=TRUE
C42 C44 C45 C46: library part CMP-03020-021676-1, "C0805 10 pF X7R 30ppm/¡ãC 5.00% 50 V", Capacitance="10 pF", Manufacturer=KEMET, Package=C0805C-DN, Temperature="-55¡ãC to +125¡ãC", Temperature Characteristic=X7R, Temperature Coefficient=30ppm/¡ãC, Temperature Range High=+125¡ãC, Temperature Range Low=-55¡ãC, Tolerance=0.05, Voltage Rating="50 V", Automotive=No, Category=Cap, ComponentLink2Description=Datasheet, ComponentLink2URL=https://content.kemet.com/datasheets/KEM_C1003_C0G_SMD.pdf, Device Class L1="Passive Components", Device Class L2=Capacitors, Device Class L3="Ceramic Capacitors", Height=0.88mm, Ipc Land Pattern Name=CAPC200125X78, Lead Free=Yes, Manufacturer Part Number=C0805C100J5RACTU, Material=Ceramic, Mouser Description="Cap, 10PF, 50V, Mlcc, 0805", Octopart=https://octopart.com/c0805c100j5ractu-kemet-81794931, RoHS=TRUE
C49: library part CMP-08246-006241-1, "Multilayer Ceramic Capacitors 2.2¦ÌF ¡À10% 16V X7R SMD 0805", Capacitance=2.2uF, Case Code (Imperial)=0805, Case Code (Metric)=2012, Dielectric=X7R, Dielectric Material=Ceramic, Max Operating Temperature=125¡ãC, Min Operating Temperature=-55¡ãC, Package Quantity=2000, Tolerance=10%, Voltage=16V, Case/Package=0805, Construction=Flat, Depth=1.25mm, Height=1.25mm, Lead Free="Lead Free", Length=2mm, Mount="Surface Mount", Number of Pins=2, Packaging="Tape and Reel", Radiation Hardening=No, REACH SVHC="No SVHC", Resistor Type=Ceramic, RoHS Compliant=Yes, Series=C, Termination=SMD/SMT, Thickness=0.057inch, Voltage Rating=16V, Voltage Rating (DC)=16V, Weight=0.000194oz, Width=1.25mm
C51 C52: library part CMP-2007-03708-1, Manufacturer=Kemet, Part Number=C0805F103K5RACTU
C53: library part CMP-13271-003813-1, "CL21 Series 0805 1uF 25V ¡À10% Tolerance X7R Multilayer Ceramic Chip Capacitor", Capacitance=1uF, Case Code (Imperial)=0805, Case Code (Metric)=2012, Dielectric=X7R, Max Operating Temperature=125¡ãC, Min Operating Temperature=-55¡ãC, Package Quantity=3000, Tolerance=10%, Voltage=25V, Case/Package=0805, Depth=1.25mm, Height=1.25mm, Length=2mm, Material=Ceramic, Mount="Surface Mount", Packaging="Tape and Reel", Radiation Hardening=No, Thickness=0.053inch, Voltage Rating=25V, Width=0.049inch
J1 J2 J3 J5 J6: library part CMP-2000-05152-3, "CONN U.FL RCPT STR 50 OHM SMD", Dielectric Material=Polymer, Frequency=6GHz, Housing Color=Beige, Insulation Resistance=500MR, Max Operating Temperature=90¡ãC, Min Operating Temperature=-40¡ãC, Package Quantity=2500, Body Material=Bronze, Body Plating=Silver, Connector Type=Coaxial, Contact Material=Brass, Contact Plating=Gold, Depth=3.1mm, Fastening Type=Snap, Gender=Male, Impedance=50R, Lead Free="Lead Free", Length=3mm, Max Frequency=6GHz, Mount="Surface Mount", Orientation=Straight, Packaging="Cut Tape", Radiation Hardening=No, REACH SVHC="No SVHC", Series=U.FL, Termination=Solder, Weight=0.001764oz, Wire/Cable Type=Coaxial
J4: library part CMP-196119-000001-2, "CONN RCPT USB2.0 TYPE C 24POS RA", Contact Material="Copper Alloy", Contact Plating=Gold, Gender=Receptacle, Number of Positions=16, Orientation="Right Angle", USB Standard="USB 2.0"
J7 J8 J9: library part CMP-04776-000237-1, "CONN HEADER VERT 3POS 2.54MM", Color=Black, Contact Resistance=20mR, Current Rating=3A, Max Operating Temperature=125¡ãC, Max Voltage Rating (DC)=350.35kV, Min Operating Temperature=-55¡ãC, Voltage Rating=350V, Contact Gender=Male, Contact Material=Brass, Contact Mating Length=6.75mm, Contact Plating=Tin, Contact Post Length=2.9mm, Gender=Male, Glow Wire Compliant=Non-compliant, Housing Color=Black, Housing Material=Polyester, Lead Free="Lead Free", Mount="Through Hole", Number of Circuits=3, Number of Contacts=3, Number of Positions=3, Number of Rows=1, Orientation=Vertical, Packaging=Tray, Pitch=2.54mm, Radiation Hardening=No, REACH SVHC="No SVHC", RoHS Compliant=Yes, Series=90120, Termination=Solder, Voltage Rating (AC)=350V
P1 P2: "Header, 2-Pin, Dual row", LatestRevisionDate=17-Jul-2002, LatestRevisionNote="Re-released for DXP Platform.", Publisher="Altium Limited"
P3: "SMB Straight Connector", LatestRevisionDate=17-Jul-2002, LatestRevisionNote="Re-released for DXP Platform.", Publisher="Altium Limited"
P4: "Header, 4-Pin, Dual row", LatestRevisionDate=17-Jul-2002, LatestRevisionNote="Re-released for DXP Platform.", Publisher="Altium Limited"
P5: "Header, 2-Pin", LatestRevisionDate=17-Jul-2002, LatestRevisionNote="Re-released for DXP Platform.", Publisher="Altium Limited"
R1 R2 R6 R7 R8 R39: library part CMP-2100-03671-1, "Chip Resistor, 1 KOhm, +/- 1%, 125 mW, -55 to 155 degC, 0805 (2012 Metric), RoHS, Tape and Reel", Case Code (Imperial)=0805, Case Code (Metric)=2012, Manufacturer=Yageo, Max Operating Temperature=155degC, Max Power Dissipation=125mW, Min Operating Temperature=-55degC, Package Description="2-Pin Surface Mounted Device, Body 2 x 1.25 mm", Package Quantity=1, Resistance=1KOhm, Temperature Coefficient=100ppm/degreesC, Tolerance=1%, Voltage Rating=150V, Case/Package=0805, Composition=ThickFilm, Datasheet URL=http://www.yageo.com/NewPortal/yageodocoutput?fileName=/pdf/R-Chip/PYu-RC_Group_51_RoHS_L_5.pdf, Datasheet Version="Rev. 5, 10/2016", Depth=1.25mm, Height=0.024inch, Lead Free=LeadFree, Length=0.079inch, Manufacturer URL=http://www.yageo.com/, Military Standard=Not, Number of Pins=2, Number of Terminations=2, Package Reference=0805, Packaging=TapeandReel, Power rating=125mW, REACH SVHC=Unknown, RoHSCompliant=true, Termination=SMD/SMT, Voltage Rating (DC)=150V, Width=0.049inch
R3 R25: library part CMP-1665-00002-5, "Chip Resistor, 0 Ohm, +/- 1%, 0.125 W, -55 to 155 degC, 0805 (2012 Metric), RoHS, Tape and Reel", Case Code (Imperial)=0805, Case Code (Metric)=2012, Max Operating Temperature="155 degC", Min Operating Temperature="-55 degC", Package Quantity=5000, Resistance="0 Ohm", Tolerance=5%, Case/Package=0805, ComponentLink1Description="Manufacturer URL", ComponentLink1URL=http://www.panasonic.com/, ComponentLink2Description=Datasheet, ComponentLink2URL=http://industrial.panasonic.com/cdbs/www-data/pdf/RDA0000/AOA0000C84.pdf, DatasheetVersion=03/2015, Height="0.6 mm", Length="2 mm", Mounting Technology="Surface Mount", PackageDescription="2-Pin Surface Mount Device, Body 2 x 1.25 mm", Packaging="Tape and Reel", PartNumber=ERJ-6GEY0R00V, Radiation Hardening=No, REACH SVHC="No SVHC", RoHSCompliant=True, Width="1.25 mm"
R4 R5 R28 R33 R46: library part CMP-2001-01840-1, Manufacturer="KOA Speer", Part Number=RK73B2ATTD510J
R9 R10 R11 R22: library part CMP-2100-03669-1, "Chip Resistor, 100 Ohm, +/-1%, 0.125 W, -55 to 155 degC, 0805 (2012 Metric), RoHS, Tape and Reel", Case Code (Imperial)=0805, Case Code (Metric)=2012, Manufacturer=Yageo, Max Operating Temperature=155degC, Max Power Dissipation=125mW, Min Operating Temperature=-55degC, Package Description="2-Pin Surface Mounted Device, Body 2 x 1.25 mm", Package Quantity=1, Resistance=100Ohm, Temperature Coefficient=100ppm/degreesC, Tolerance=1%, Voltage Rating=150V, Case/Package=0805, Composition=ThickFilm, Datasheet URL=http://www.yageo.com/NewPortal/yageodocoutput?fileName=/pdf/R-Chip/PYu-RC_Group_51_RoHS_L_5.pdf, Datasheet Version="Rev. 5, 10/2016", Depth=1.25mm, Height=0.024inch, Lead Free=LeadFree, Lead Pitch=0.4mm, Length=2mm, Manufacturer URL=http://www.yageo.com/, Military Standard=Not, Number of Pins=2, Number of Terminations=2, Package Reference=0805, Packaging=TapeandReel, Power rating=125mW, REACH SVHC=Unknown, RoHSCompliant=true, Termination=SMD/SMT, Voltage Rating (DC)=150V, Width=0.049inch
R12 R13 R14 R15 R16 R17 R18 R19 R20 R21 R23 R24 R27 R29 R31 R32 R34 R35: library part CMP-1659-00015-4, "Chip Resistor, 33 Ohm, +/- 1%, 0.125 W, -55 to 155 degC, 0805 (2012 Metric), RoHS, Tape and Reel", Manufacturer=Yageo, Max Operating Temperature="155 degC", Min Operating Temperature="-55 degC", Package Quantity=5000, Voltage Rating="150 V", ComponentLink1Description="Manufacturer URL", ComponentLink1URL=http://www.yageo.com/, ComponentLink2Description=Datasheet, ComponentLink2URL=http://www.yageo.com/documents/recent/PYu-RC_Group_51_RoHS_L_04.pdf, DatasheetVersion="Rev. 4, 02/2016", Height="0.5 mm", Length="2 mm", Mount="Surface Mount", Mounting Technology="Surface Mount", PackageDescription="2-Pin Surface Mounted Device, Body 2 x 1.25 mm", PackageReference=0805, Packaging="Tape and Reel", Pins=2, REACH SVHC="No SVHC", RoHSCompliant=true
R26 R30: library part CMP-2001-01391-1, Manufacturer=Yageo, Part Number=RC0805JR-075R1L
R36: library part CMP-2001-02011-1, Manufacturer="KOA Speer", Part Number=RK73H2ATTD10R0F
R37 R38: library part CMP-2001-01993-1, Manufacturer="KOA Speer", Part Number=RK73H2ATTD1002F
R41 R42 R43 R45: library part CMP-2001-01840-1, Manufacturer="KOA Speer", Part Number=RK73B2ATTD510J
R44: library part CMP-2001-03660-1, Manufacturer="Vishay Dale", Part Number=CRCW0805200KFKEA
U1: library part CMP-09116-000192-1, "IC OPAMP VFB 4 CIRCUIT 14TSSOP", Case/Package=TSSOP, Dual Supply Voltage=5V, Input Bias Current=1.2uA, Input Offset Voltage (Vos)=140uV, Max Operating Temperature=125¡ãC, Max Supply Voltage=11V, Min Operating Temperature=-40¡ãC, Min Supply Voltage=2.7V, Operating Supply Current=1mA, Output Current per Channel=80mA, Power Supply Rejection Ratio (PSRR)=98dB, Voltage Gain=130dB, -3db Bandwidth=180MHz, Common Mode Rejection Ratio=96dB, Gain Bandwidth Product=170MHz, Lead Free="Contains Lead", Mount="Surface Mount", Number of Circuits=4, Number of Pins=14, Packaging="Tape and Reel", RoHS Compliant=Yes, Slew Rate=225V/¦Ìs
U2: library part CMP-06324-000075-1, "IC REG LINEAR 3V 300MA SOT23-5", Case/Package=SOT-23-5, Dropout Voltage=160mV, Max Operating Temperature=125¡ãC, Min Current Limit=400mA, Min Operating Temperature=-40¡ãC, Output Current=300mA, Output Voltage=3V, Mount="Surface Mount", Number of Regulators=1, Packaging="Tape and Reel", RoHS Compliant=Yes
U3: library part CMP-06324-000114-1, "IC REG LIN 3.3V 150MA TSOT23-5", Case/Package=SOT-23-5, Dropout Voltage=155mV, Max Input Voltage=5.5V, Max Operating Temperature=125¡ãC, Min Current Limit=200mA, Min Input Voltage=2.5V, Min Operating Temperature=-40¡ãC, Min Output Voltage=3.3V, Output Current=150mA, Output Voltage Accuracy=2%, Package Quantity=1, Power Supply Rejection Ratio (PSRR)=65dB, Quiescent Current=39uA, Mount="Surface Mount", Number of Outputs=1, Number of Pins=23, Number of Regulators=1, Output Configuration=Positive, Output Type=Fixed, Output Voltage=3.3V, Packaging="Tape and Reel", Polarity=Positive, Radiation Hardening=No, RoHS Compliant=Yes, Series=-
U5 U8: "IC TXRX NON-INVERT 3.6V 20-DQFN"
U6: library part CMP-09081-000363-1, "IC ADC 16BIT PIPELINED 48QFN", Case/Package=QFN, Max Operating Temperature=75¡ãC, Max Power Dissipation=264mW, Min Operating Temperature=0¡ãC, Package Quantity=2000, Interface=Parallel, Mount="Surface Mount", Number of Bits=16, Number of Converters=1, Number of Pins=48, Packaging="Tape and Reel", RoHS Compliant=Yes, Sampling Rate=25000000S/s, Supply Type=Single
U7: library part CMP-09116-000202-1, "IC OPAMP DIFF 1 CIRCUIT 8MSOP", RoHS Compliant=Yes
U9: library part CMP-0859-00373-3, "Single 2-Input Exclusive-OR Gate, DCK0005A, LARGE T&R", F @ Nom Voltage(Max)(Mhz)=250, Generic Part Number=SN74AUC1G86, ICC @ Nom Voltage(Max)(mA)=0.01, Manufacturer="Texas Instruments", Operating Temperature Range(C)="-40 to 85", Rating=Catalog, tpd @ Nom Voltage(Max)(ns)=5.5,3.8,2.6,1.7,1.3, Voltage(Nom)(V)=0.8,1.2,1.5,1.8,2.5, 3-State Output=No, Bits(#)=1, DatasheetVersion=SCES389J, Gate Type=XOR, Input Type=CMOS, Logic=True, Output Drive (IOL/IOH)(Max)(mA)=9/-9, Output Type=CMOS, PackageReference=DCK0005A, Schmitt Trigger=No, Sub-Family="XOR Gate", Technology Family=AUC, VCC(Max)(V)=2.7, VCC(Min)(V)=0.8
U10: library part CMP-0475-00260-1, "Low Noise Dual Supply Inverting Charge Pump, 4.5 to 32 V Vin, Adjustable Vout, 16-pin SOP (MSE-16-EDP), -40 to 125 degC, Pb-Free, Tape and Reel", Frequency(kHz)=500, Manufacturer="Linear Technology", ComponentLink1Description="Manufacturer URL", ComponentLink1URL=http://www.linear.com/, ComponentLink2Description=Datasheet, ComponentLink2URL=http://cds.linear.com/docs/en/datasheet/3260fa.pdf, ComponentLink3Description="Package Specification", ComponentLink3URL=http://cds.linear.com/docs/en/packaging/05081667_F_MSE16.pdf, DatasheetVersion="Rev. A", Ishutdown(uA)=2, Isupply(mA)=0.1, Max Iout(mA)=100, Mounting Technology="Surface Mount", PackageDescription="16-Pin Plastic MSOP, Exposed Die Pad, Body 4.039 x 3 mm, Pitch 0.5 mm", PackageReference=MSE-16, PackageVersion="Rev. F, 05/2013", Packing="Tape and Reel", PartNumber=LTC3260EMSE#TRPBF, RoHS=TRUE, Vin Max(V)=32, Vin Min(V)=4.5, Voutput=Adj
W1 W2 W3 W4: "Jumper Wire", LatestRevisionDate=17-Jul-2002, LatestRevisionNote="Re-released for DXP Platform.", PackageDescription="Radial Cap, Thru-Hole; 2 Leads; 0.2 in Pin Spacing", PackageReference=RAD-0.2, Published=24-Mar-1999, Publisher="Altium Limited"
R40: SimulationGenericComponent=True, TC1=0, TC2=0

## Via types
v1: diameter 0.9, hole 0.5, Top Layer to Bottom Layer, tented top, 195 vias
v2: diameter 0.6, hole 0.3, Top Layer to Bottom Layer, tented top, 84 vias
v3: diameter 0.5, hole 0.2, Top Layer to Bottom Layer, tented top, 6 vias
v4: diameter 1, hole 0.6, Top Layer to Bottom Layer, tented top, 2 vias
v5: diameter 0.6, hole 0.3, Top Layer to Bottom Layer, tented both sides, 1 vias
v6: diameter 0.8, hole 0.4, Top Layer to Bottom Layer, tented both sides, 1 vias

## Nets (pads, with @x,y where several pads share a name; then routed paths per layer and width w, separated by ;. In a path a pad name is that pad's centre, name@x,y a point inside that pad or via, vN(x,y) a via of type N, cw(c..) or ccw(c..) an arc to the next point about the centre after c; other vN are vias at no path point)
+5V: C1.1 C2.1 C3.1 C38.1 C39.1 C40.1 P1.1 P1.3 U1.4 U7.3 W1.2 | length 118.8
  Top Layer w0.25: U1.4@53.707,101.733 53.707,102.889 54.102,103.283 v2(54.102,103.378) 55.285,103.378 55.836,103.93 56.036,103.93 56.386,104.28 56.209,104.457 C1.1@56.209,108.29 ; U7.3@70.669,90.89 70.669,89 71.195,88.474 C38.1@71.195,88.224 71.247,88.172 C40.1@71.247,83.907
  Top Layer w0.4: P1.3@93.726,62.611 P1.1@93.726,65.151
  Top Layer w0.6: v2(71.247,82.169) C40.1@71.247,83.907
  Bottom Layer w0.6: v2(54.102,103.378) 54.102,90.746 59.563,85.285 W1.2@59.563,72.39 ; v2(71.247,82.169) 61.468,72.39 W1.2@59.563,72.39 ; P1.3@93.726,62.611 93.726,59.817 93.218,59.309 60.325,59.309 59.563,60.071 W1.2@59.563,72.39
-5V: C6.1 C7.1 C8.1 P1.2 P1.4 U1.11 W2.2 | length 85.2
  Top Layer w0.25: v2(52.959,93.853) 53.707,94.601 U1.11@53.707,96.051 53.707,97.141 54.442,97.876 C7.1@57.456,97.876 ; C6.1@57.479,95.971 57.479,99.858 C8.1@57.656,100.035
  Top Layer w0.4: P1.4@96.266,62.611 P1.2@96.266,65.151
  Layer 2 w0.6: v2(52.959,93.853) 59.597,87.215 59.597,77.817 W2.2@66.421,70.993 66.421,61.722 68.453,59.69 95.504,59.69 96.266,60.452 P1.4@96.266,62.611